# Altium PCB PCB1.PcbDoc
Units mm, origin at the board's own origin, x right, y up, seen from the top; angles counter-clockwise.
Board outline 100 x 100 mm, 2 copper layers (Top Layer, Bottom Layer); 55 components, 40 nets, 167 pads, 48 vias.
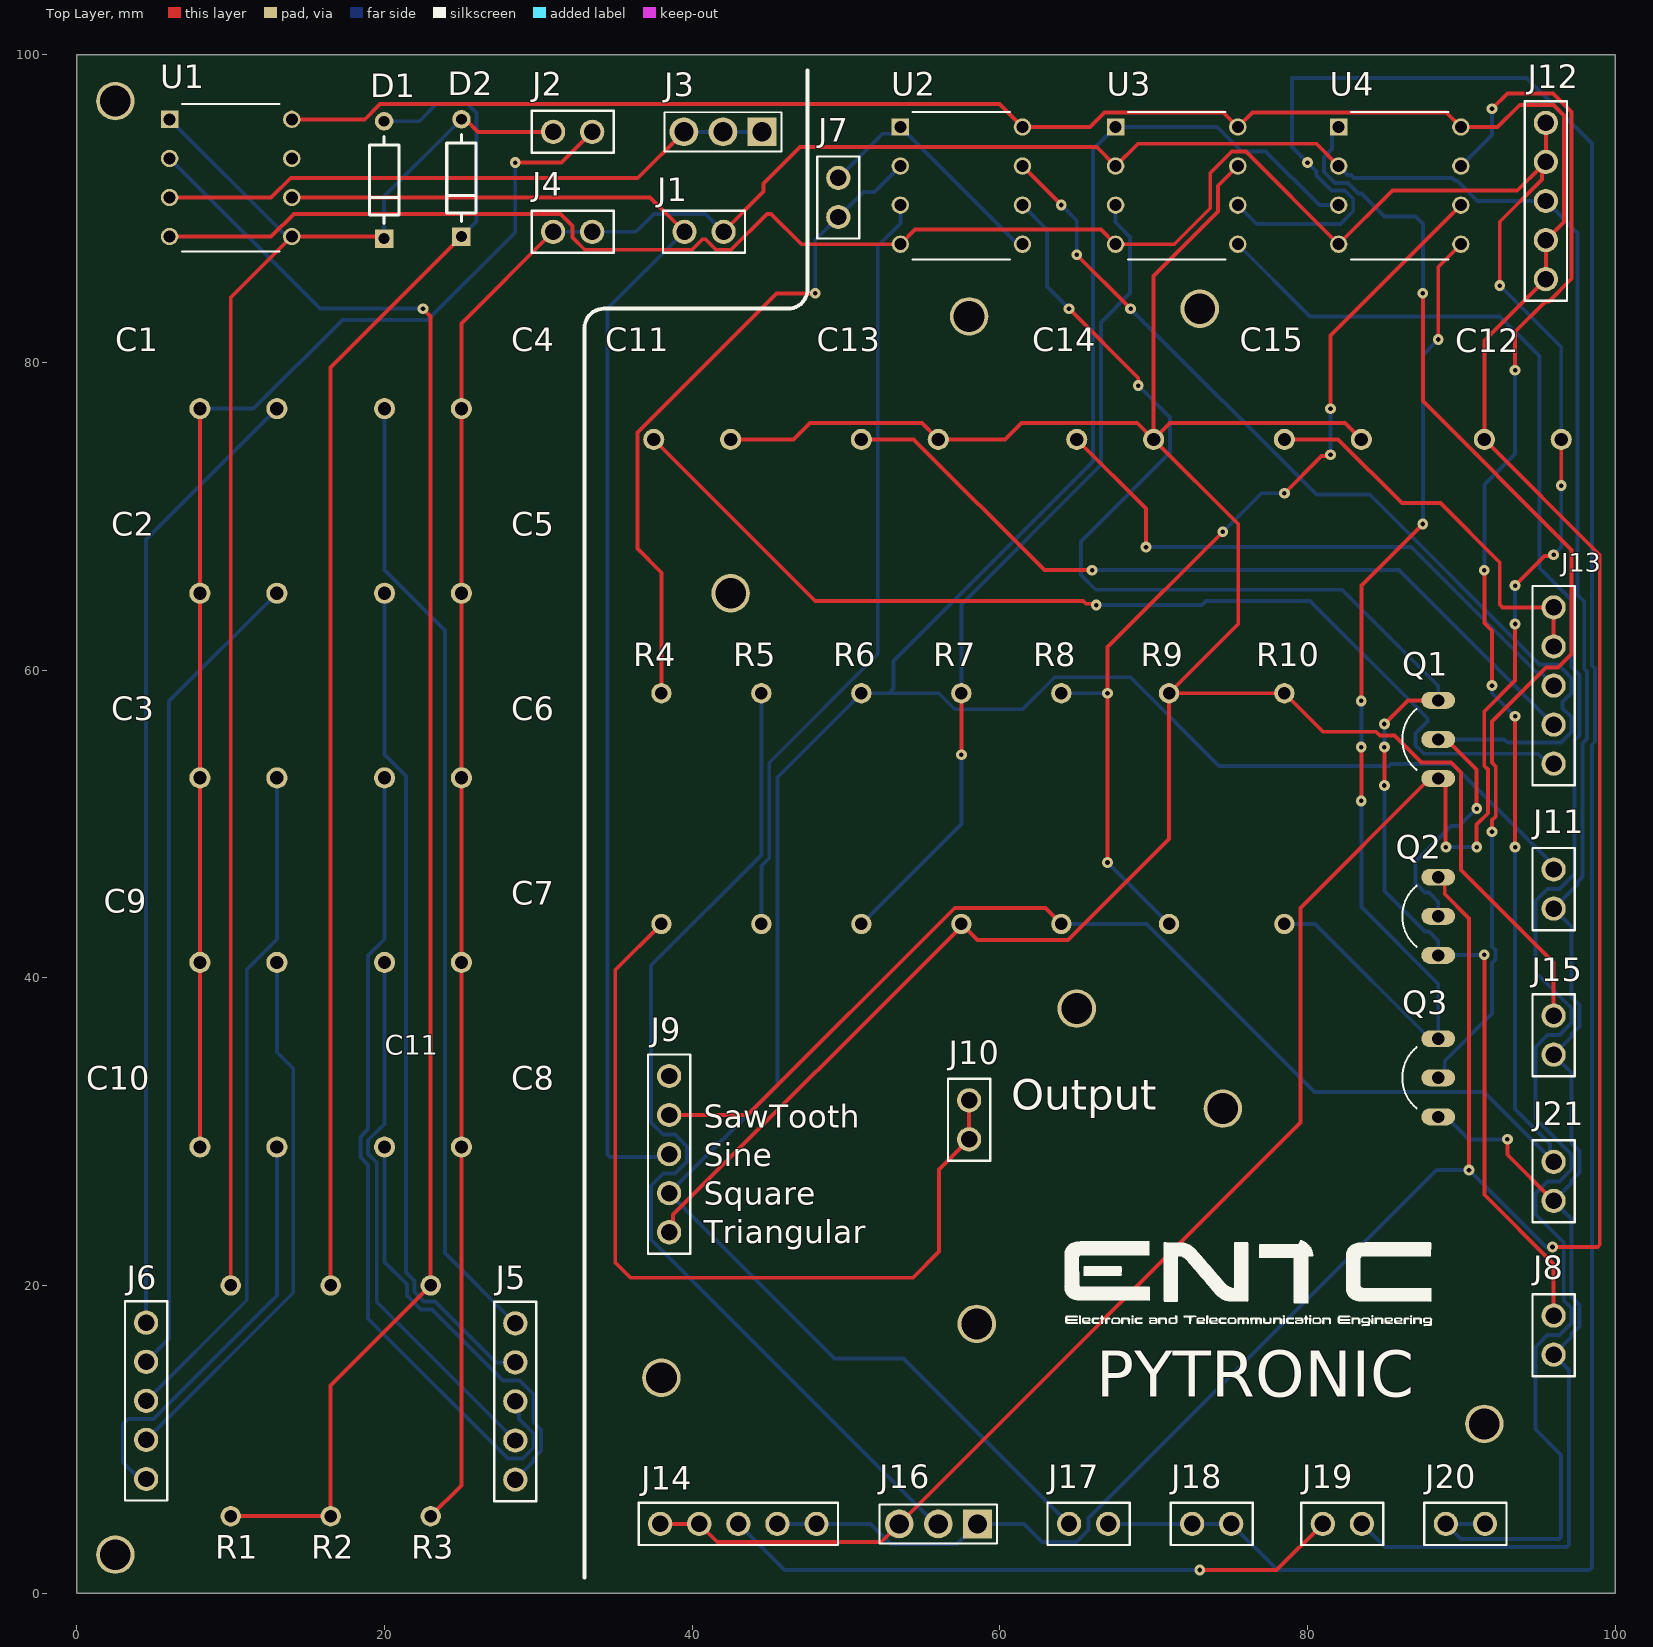
[diagram p0: Top Layer view]
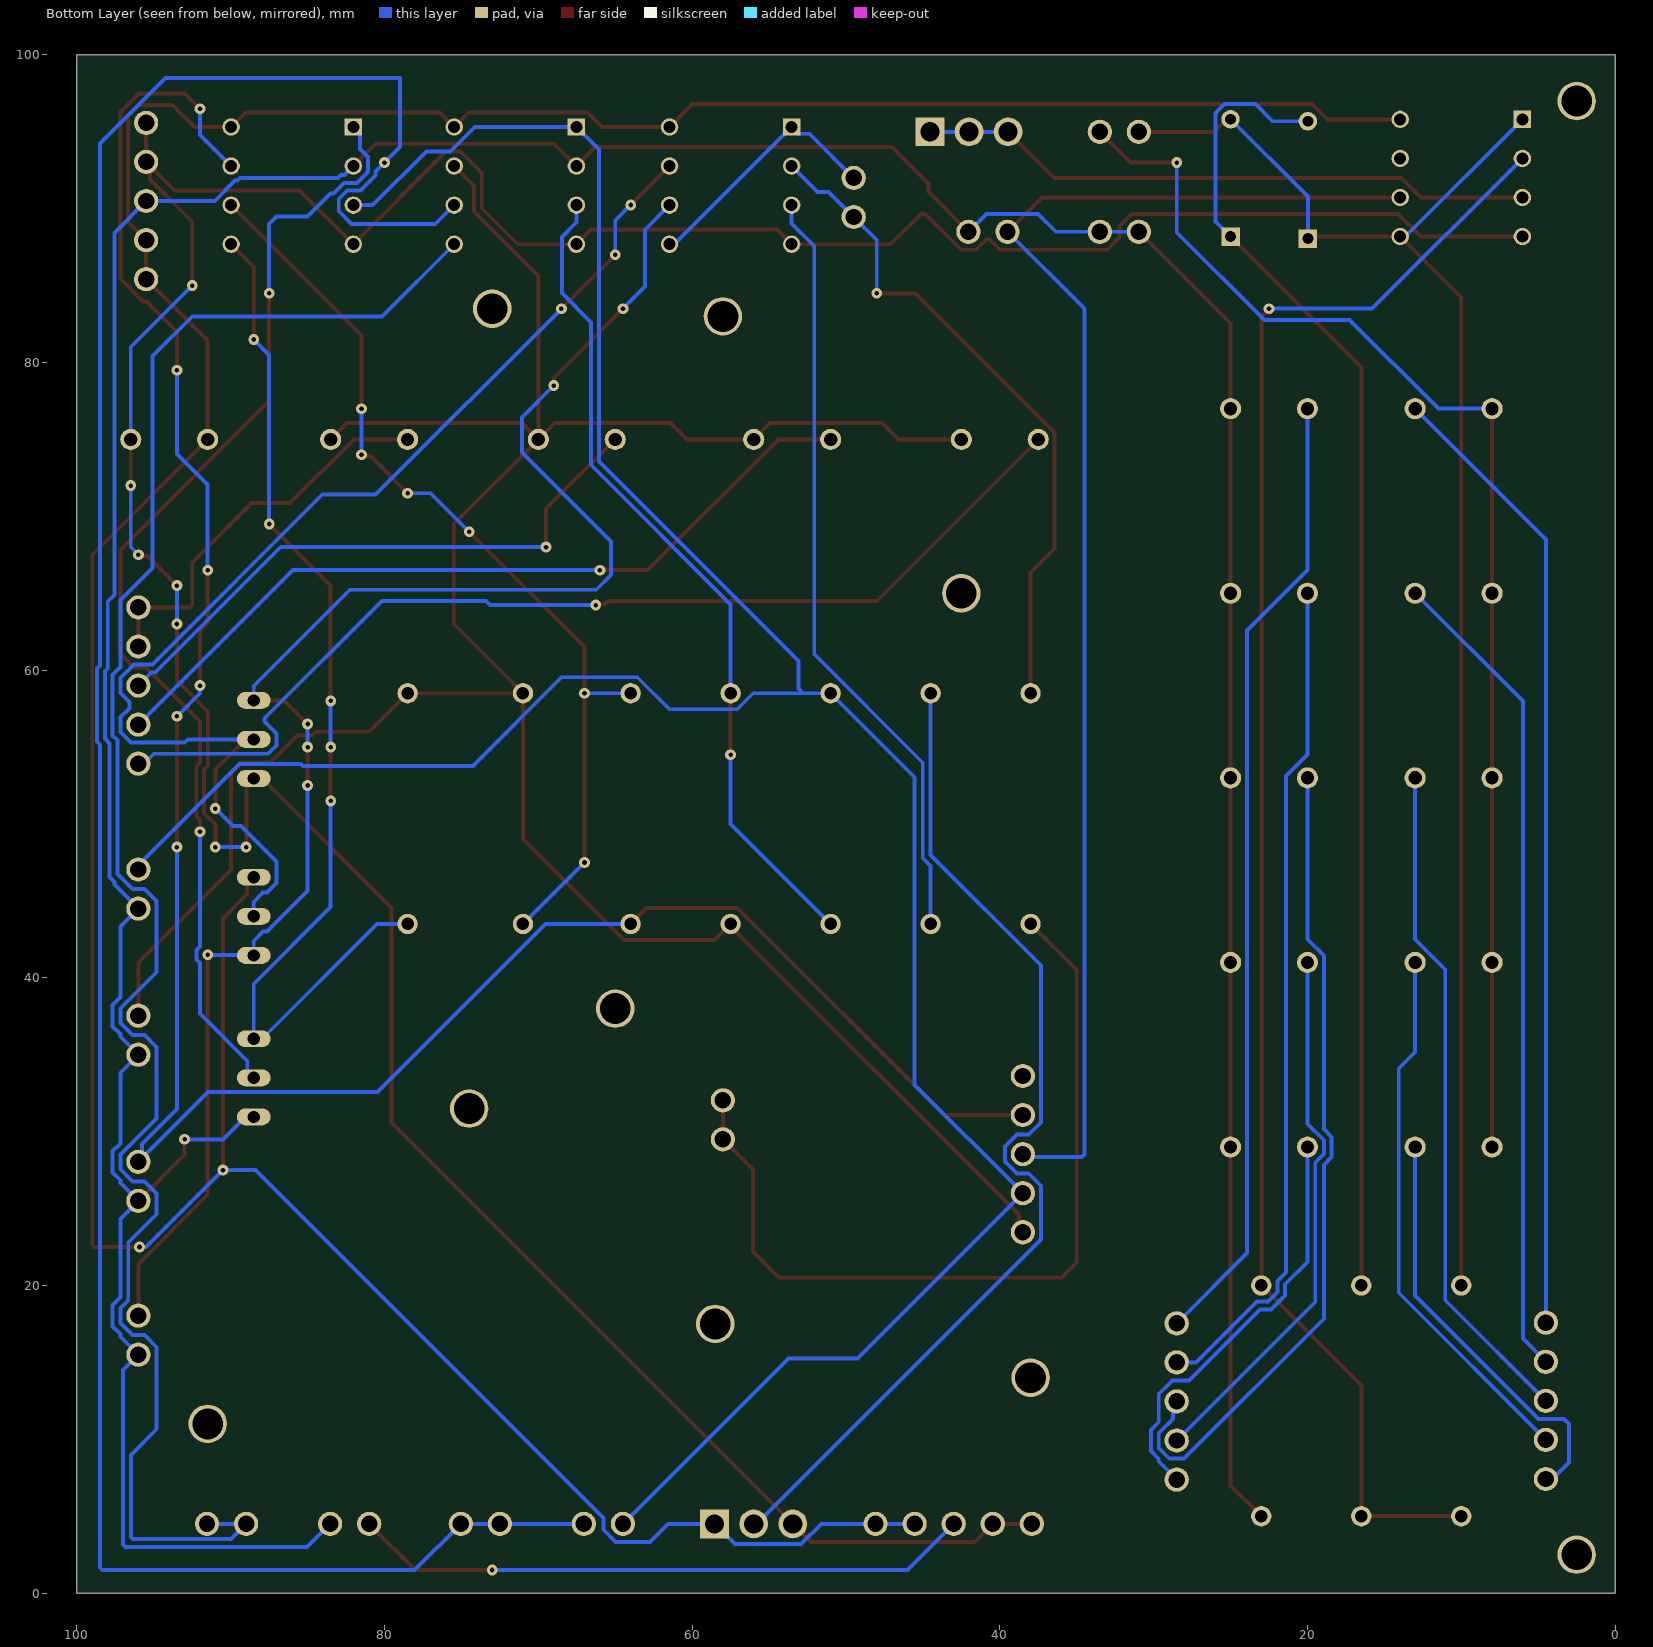
[diagram p1: Bottom Layer view, seen from below]
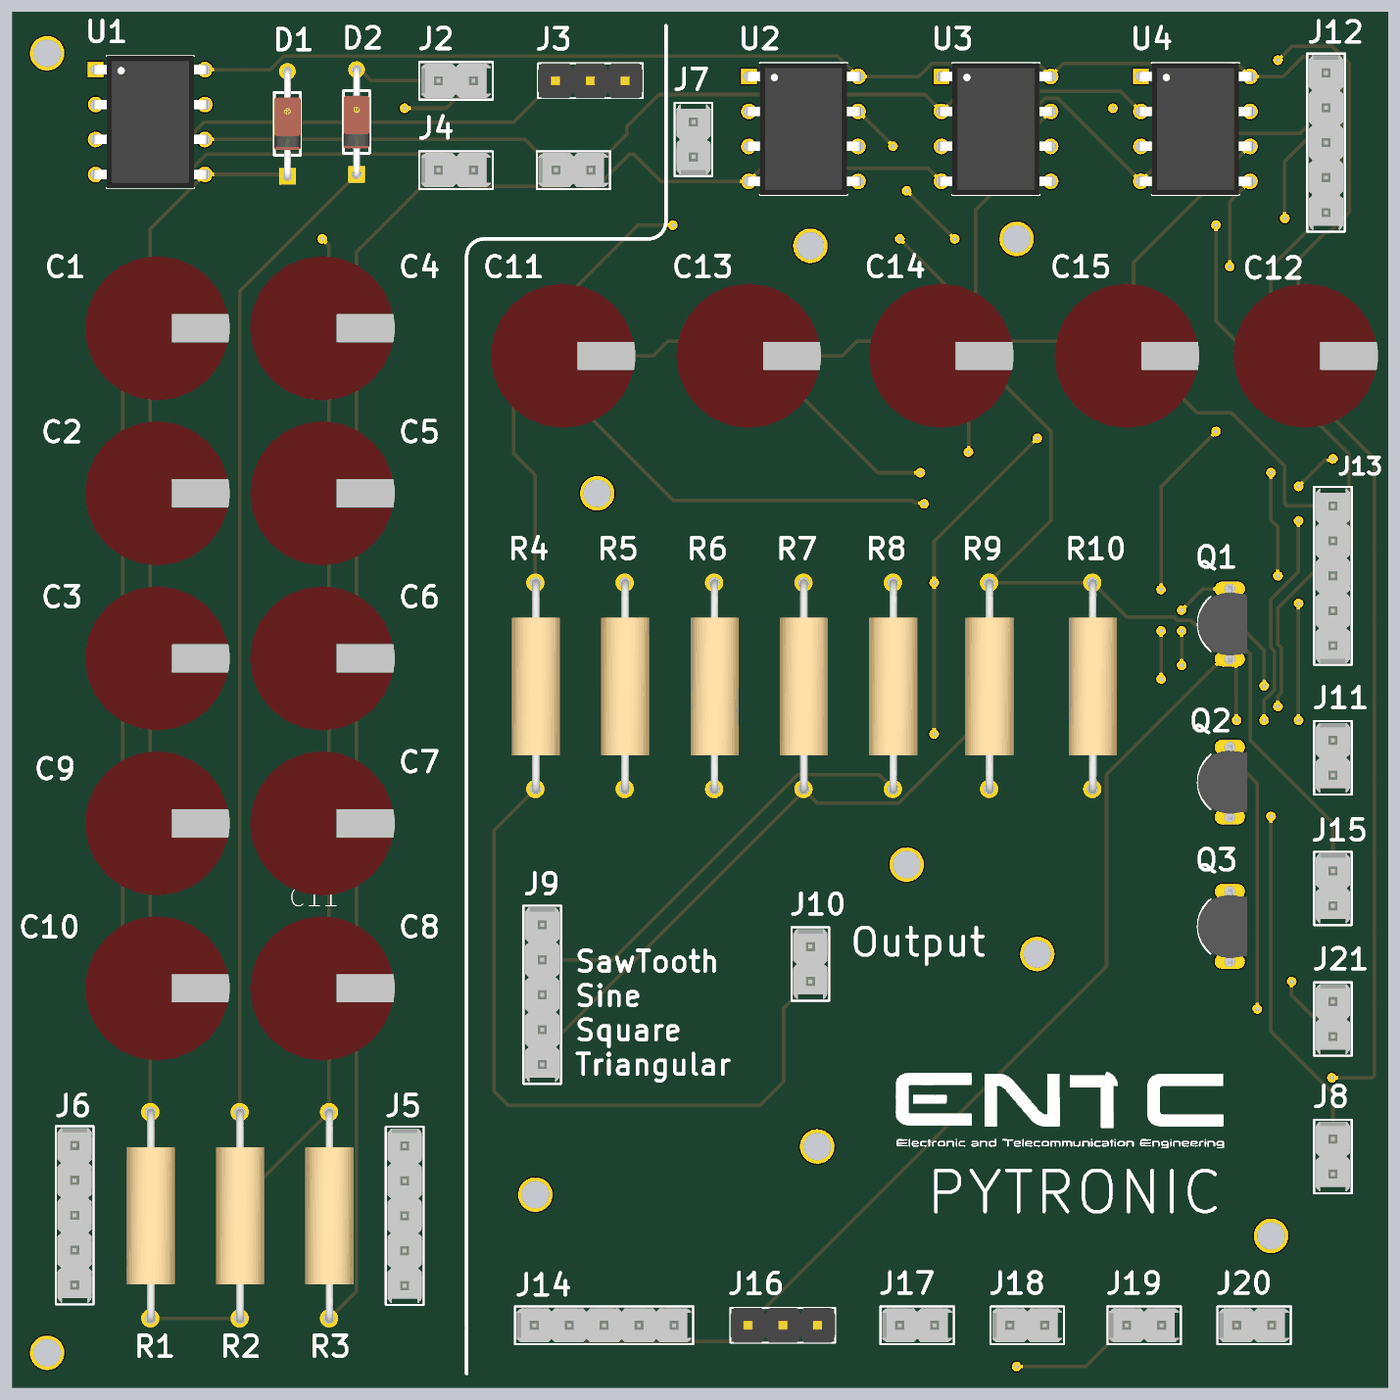
[diagram p2: 3D render of the assembled board from above, using the file's embedded part models]

## Layer stack, top to bottom
Top Solder: solder mask 0.0102, Solder Resist, Dk 3.5
Top Layer: signal copper 0.0356
Dielectric 1: dielectric 0.32, FR-4, Dk 4.8
Bottom Layer: signal copper 0.0356
Bottom Solder: solder mask 0.0102, Solder Resist, Dk 3.5

## Board outline
0,0.046 0.046,0 100,0 100,100 0,100 0,0

## Design rules (kind name [scope] priority, off if disabled: settings)
Clearance [All] p1: gap=0.254 ignorepadtopadclearanceinfootprint=FALSE
PolygonConnect [All] p1: connectstyle=Relief reliefconductorwidth=0.254 reliefentries=4 polygonreliefangle="90 Angle" airgapwidth=0.254
RoutingVias [All] p1: holewidth=0.711 width=1.27 viastyle="Through Hole" minholewidth=0.711 minwidth=1.27 maxholewidth=0.711 maxwidth=1.27
SolderMaskExpansion [All] p1: expansion=0.102 istentingtop=FALSE
SupplyNets "Schematic Supply Nets" [InNet('GND')] p1: voltage=0.000
Width [All] p1: maxlimit=0.254 minlimit=0.254 preferedwidth=0.254
30 further rules are at their usual default settings.

## Components (designator, comment, footprint, x,y, rotation, side; value= is the part's Value field where it differs from the comment)
C1 "10u" CAPACITORS 8,77 r0 top
C2 "0.1n" CAPACITORS 8,65 r0 top
C3 "100n" CAPACITORS 8,53 r0 top
C4 "10u" CAPACITORS 20,77 r0 top
C5 "0.1n" CAPACITORS 20,65 r0 top
C6 "100n" CAPACITORS 20,53 r0 top
C7 "47n" CAPACITORS 20,41 r0 top
C8 "10p" CAPACITORS 20,29 r0 top
C9 "47n" CAPACITORS 8,41 r0 top
C10 "10p" CAPACITORS 8,29 r0 top
C11 "1u" CAPACITORS 37.5,75 r0 top
C12 "1u" CAPACITORS 91.5,75 r0 top
C13 "0.1u" CAPACITORS 51,75 r0 top
C14 "0.01u" CAPACITORS 65,75 r0 top
C15 "1n" CAPACITORS 78.5,75 r0 top
D1 "1N4148TR" FP-017AG-MFG 19.974,91.87 r90 top value=4pF
D2 "1N4148TR" FP-017AG-MFG 25,92 r90 top value=4pF
J1 "Sine Wave" "02PIN HEADERS" 39.5,88.5 r180 top
J2 "Series Res" "02PIN HEADERS" 30.96,95 r180 top
J3 "C2937625" "03PIN HEADERS" 42,95 r180 top
J4 "Shunt Res" "02PIN HEADERS" 30.96,88.5 r180 top
J5 "Shunt Cap" "05pin Headers" 28.5,17.54 r90 top
J6 "Series Cap" "05pin Headers" 4.5,17.58 r90 top
J7 "Offset" "02PIN HEADERS" 49.5,89.46 r270 top
J8 "Final Output" "02PIN HEADERS" 96,18.04 r90 top
J9 "Wave Selecter" "05pin Headers" 38.5,33.62 r90 top
J10 "Wave Connector" "02PIN HEADERS" 58,32.04 r90 top
J11 "Square Wave" "02PIN HEADERS" 96,47.04 r90 top
J12 "Power In" "05pin Headers" 95.5,95.58 r90 top
J13 "5 Headers" "05pin Headers" 96,53.92 r270 top
J14 "5 Headers" "05pin Headers" 37.92,4.5 r180 top
J15 "Triangular Wave" "02PIN HEADERS" 96,37.54 r90 top
J16 "C2937625" "03PIN HEADERS" 56,4.5 r180 top
J17 "2 Headers" "02PIN HEADERS" 64.5,4.5 r180 top
J18 "2 Headers" "02PIN HEADERS" 72.5,4.5 r180 top
J19 "2 Headers" "02PIN HEADERS" 81,4.5 r180 top
J20 "2 Headers" "02PIN HEADERS" 89,4.5 r180 top
J21 "Saw Tooth Wave" "02PIN HEADERS" 96,28.04 r90 top
Q1 "BC557A" TO92254P460H750-3 88.5,55.5 r90 top
Q2 "P2N2222AG" TO92254P460H750-3 88.5,44 r90 top
Q3 "2N3904BU" TO92254P460H750-3 88.5,33.5 r90 top
R1 "100k" Resistor 10,5 r90 top
R2 "47k" Resistor 16.5,5 r90 top
R3 "47k" Resistor 23,5 r90 top
R4 "1k" Resistor 38,43.5 r90 top
R5 "1k" Resistor 44.5,43.5 r90 top
R6 "47k" Resistor 51,43.5 r90 top
R7 "10k" Resistor 57.5,43.5 r90 top
R8 "10k" Resistor 64,43.5 r90 top
R9 "10k" Resistor 71,43.5 r90 top
R10 "10k" Resistor 78.5,43.5 r90 top
U1 "TL072CP" TL072CP 10,92 r0 top
U2 "TL072CP" TL072CP 57.5,91.5 r0 top
U3 "TL072CP" TL072CP 71.5,91.5 r0 top
U4 "TL072CP" TL072CP 86,91.5 r0 top

## Footprints (in the part's own frame and the unit in brackets; to place one, negate y for a bottom-side part, rotate by r counter-clockwise, add the part's x,y. Pads: shape width x height; smd on the part's side, far side on the other; paste and mask are expansions set on the pad)
"02PIN HEADERS" [mil]
  round 62 / inner round 60 / far side round 62 hole 42 paste-99999 mask+0: 1(0,0) 2(-100,0)
  silkscreen extent -155,-54 55,54, body extent -150,-49 50,49, height 384
"03PIN HEADERS" [mm]
  rect 1.875x1.875 / inner round 1.875 / far side rect 1.875x1.875 hole 1.25: 1(-2.54,0)
  round 1.875 hole 1.25: 2(0,0) 3(2.54,0)
  silkscreen extent -3.81,-1.27 3.81,1.27, body extent -3.81,-1.27 3.81,1.27, height 7.27
"05pin Headers" [mil]
  round 62 hole 42: 1(0,0) 2(-100,0) 3(-200,0) 4(-300,0) 5(-400,0)
  silkscreen extent -455,-54 55,54, body extent -450,-49 50,49, height 388
CAPACITORS [mil]
  round 54 / inner round 60 / far side round 54 hole 34 paste-99999 mask+0: 1(0,0) 2(196.85,0)
  body extent -108,-206 306,206, height 867
FP-017AG-MFG [mm]
  rect 1.2x1.2 hole 0.7 paste-2539.97 mask+0: 1(-3.813,0)
  round 1.2 hole 0.7 paste-2539.97 mask+0: 2(3.813,0)
  silkscreen extent -2.81,-0.95 2.81,0.95, body extent -4.51,-1.05 4.51,1.05, height 0.25
Resistor [mil]
  round 52 / inner round 60 / far side round 52 hole 32 paste-99999 mask+0: 1(0,0) 2(590.55,0)
  body extent -13,-70 600,68, height 137
TL072CP [mm]
  rect 1.13x1.13 / inner round 1.13 / far side rect 1.13x1.13 hole 0.78 mask+0.102: 1(-3.97,3.81)
  round 1.13 hole 0.78 mask+0.102: 2(-3.97,1.27) 3(-3.97,-1.27) 4(-3.97,-3.81) 5(3.97,-3.81) 6(3.97,-1.27) 7(3.97,1.27) 8(3.97,3.81)
  silkscreen extent -3.17,-4.79 3.17,4.79, body extent -4.15,-4.79 4.15,4.79, height 5.08
TO92254P460H750-3 [mm]
  oval 1.1x2.2 hole 0.79: 1(-2.54,0) 2(0,0) 3(2.54,0)
  silkscreen extent -1.99,1.4 1.99,2.33, body extent -2.74,-1.27 2.74,2.33, height 8.09

## Part data
C1 C4: library part CC1206JRNPO9BN100, "400V10uF CD110", LCSC=C2960249
C2 C5: library part CC1206JRNPO9BN100, "USR1H0R1MDD", LCSC=C5112145
C3 C6 C15: library part CC1206JRNPO9BN100, "CK45-B3DD102KYNNA", LCSC=C97722
C7 C9: library part CC1206JRNPO9BN100, "KP473J2J0702", LCSC=C390077
C8 C10: library part CC1206JRNPO9BN100, "CC45SL3FD100JYNNA", LCSC=C694205
C11: library part CC1206JRNPO9BN100, "PE105J2A0502", LCSC=C390070
C12: library part CC1206JRNPO9BN100, "CC1206KKX7R7BB105", LCSC=C106236
C13: library part CC1206JRNPO9BN100, "MPP104J2G10NN22640", LCSC=C506840
C14: library part CC1206JRNPO9BN100, "KP103J2G0501", LCSC=C3019055
D1 D2: library part CMP-07163-000030-1, "DIODE GEN PURP 100V 200MA DO35", Capacitance=4pF, Forward Current=200mA, LCSC=C84410, Manufacturer="ON Semiconductor", Max Junction Temp=+175°C, Max Repetitive Reverse Voltage=100V, Max Surge Forward Current=1A, Package=017AG, Peak Reverse Current=5uA, Temperature="-55°C to +175°C", Temperature Range Low=-55°C, Automotive=No, Category=Diode, ComponentLink2Description=Datasheet, ComponentLink2URL=https://www.onsemi.com/pub/Collateral/1N914A-D.pdf, Device Class L1="Discrete Semiconductors", Device Class L2=Diodes, Device Class L3="Rectifier Diodes", Digikey Description="DIODE GEN PURP 100V 200MA DO35", Footprint Url=https://www.onsemi.com/pub/Collateral/017AG.PDF, Height=1.91mm, Lead Free=Yes, Manufacturer Part Number=1N4148TR, Mouser Description="1N4148 Series 100 V 500 mW Small Signal Fast Switching Diode - DO-35", Octopart=https://octopart.com/1n4148tr-on+semiconductor-84323125, Reverse Voltage=100V, RoHS=TRUE, Temperature Range High=+175°C
J1 J2 J4 J7 J8 J10 J11 J15 J17 J18 J19 J20 J21: library part 22284025, "KK 254 Breakaway Header, Vertical, 2 Circuits, 0.38Âµm Gold (Au) Selective Plating, Mating Pin Length 7.49mm", LCSC=C6025575, Manufacturer_Name="Molex Connector Corporation", Copyright="Copyright (C) 2025 Ultra Librarian. All rights reserved.", Manufacturer_Part_Number=22284025, RefDes=RefDes, Type=Type
J3 J16: library part 61300311121, Package=None, Availability=Unavailable, LCSC=C2937625, MP=61300311121, Price=None
J5 J6 J9 J12 J13 J14: library part 22284055, LCSC=C6956150, Package=None, Availability=Unavailable, MP=22284055, Price=None
Q1: "BC557ATA", LCSC=C900807, Package="TO-92 Diotec", Check_prices=https://www.snapeda.com/parts/BC557A/Diotec/view-part/?ref=eda, MF="Diotec Semiconductor", MP=BC557A, SnapEDA_Link=https://www.snapeda.com/parts/BC557A/Diotec/view-part/?ref=snap
R1: library part RT1206WRD07100KL, LCSC=C1365491, Package=None, Availability=Unavailable, MP=RT1206WRD07100KL, Price=None
R2 R3 R6: library part RT1206WRD0747KL, LCSC=C1365518
R4 R5: library part RT1206WRD0710KL, "ROX1SJ1K0", LCSC=C1368147
R7 R8 R9 R10: library part RT1206WRD0710KL, LCSC=C1368139
U1 U2 U3 U4: LCSC=C7236

## Free pads (board coordinates)
  round 2.5 hole 2: 8(2.5,97) 9(2.5,2.5) 10(38,14) 11(58.5,17.5) 12(74.5,31.5) 13(65,38) 14(91.5,11) 15(58,83) 16(73,83.5) 17(42.5,65)

## Via types
v1: diameter 0.7, hole 0.3, Top Layer to Bottom Layer, 48 vias

## Nets (pads, with @x,y where several pads share a name; then routed paths per layer and width w, separated by ;. In a path a pad name is that pad's centre, name@x,y a point inside that pad or via, vN(x,y) a via of type N, cw(c..) or ccw(c..) an arc to the next point about the centre after c; other vN are vias at no path point)
+VCC: C12.1 J12.4 J12.5 J14.4 J14.5 J16.1 Q2.3 U1.8 U2.8 U3.8 U4.8 | length 252.3
  Top Layer w0.254: U1.8 18.713,95.81 19.697,96.794 59.986,96.794 U2.8 65.861,95.31 66.807,96.256 74.524,96.256 U3.8 76.416,96.256 89.024,96.256 U4.8 92.364,95.31 93.802,96.748 95.984,96.748 96.668,96.064 96.668,89.128 J12.4 J12.5 91.5,81.42 C12.1 99,67.5 99,22.649 98.851,22.5 v1(95.929,22.5) ; Q2.3 88.532,46.54 88.923,46.149 88.923,45.444 90.5,43.867 v1(90.5,27.5)
  Bottom Layer w0.254: J14.4 J14.5 51.595,4.5 52.914,3.181 57.221,3.181 J16.1 61.583,4.5 62.751,3.332 64.984,3.332 65.77,4.118 65.77,4.882 88.388,27.5 v1(90.5,27.5) 95.5,22.5 v1(95.929,22.5)
-VCC: C12.2 J12.1 J12.2 J14.1 J14.2 J16.3 Q1.1 U1.4 U2.4 U3.4 U4.4 | length 242.1
  Top Layer w0.254: U1.4 12.632,88.19 14.111,89.668 31.444,89.668 32.23,88.882 32.23,88.118 33.016,87.332 39.984,87.332 40.665,88.012 40.875,88.012 41.556,87.332 42.524,87.332 44.861,89.668 45.126,89.668 47.105,87.69 U2.4 54.476,88.636 66.584,88.636 U3.4 71.341,87.69 73.683,90.031 73.683,92.321 75.078,93.716 76.004,93.716 U4.4 85.516,91.176 93.636,91.176 J12.2@95.247,92.787 ; J14.1 J14.2 41.628,3.332 52.292,3.332 J16.3 79.541,30.581 79.541,44.551 87.95,52.96 Q1.1 88.571,52.96 88.961,52.569 88.961,48.539 v1(89,48.5) ; v1(91,48.5) 91,49.966 91.731,50.697 91.731,53.537 91.492,53.776 91.492,57.324 93.5,59.332 v1(93.5,63) ; v1(92.5,85) 92.5,89.152 95.247,91.9 J12.2@95.247,92.787 ; v1(93.5,65.5) 95.415,67.415 95.915,67.415 v1(96,67.5) ; J12.1 J12.2 J12.2@95.247,92.787 ; v1(96.5,72) C12.2
  Bottom Layer w0.254: v1(89,48.5) v1(91,48.5) ; v1(92.5,85) 96.5,81 C12.2 ; v1(93.5,63) v1(93.5,65.5) ; v1(96,67.5) 96.5,68 v1(96.5,72)
GND: C4.2 C5.2 C6.2 C7.2 C8.2 J1.2 J4.1 J4.2 J8.2 J11.2 J12.3 J15.2 J19.2 J21.2 Q3.1 R3.1 U3.2 U4.2 | length 276
  Top Layer w0.254: R3.1 25,7 C8.2 C7.2 C6.2 C5.2 C4.2 25,82.54 J4.1 ; J1.2 44.646,91.106 44.646,91.646 47,94 66.3,94 U3.2 68.984,94.224 80.576,94.224 U4.2 ; v1(93,29.5) 93,28.5 J21.2
  Bottom Layer w0.254: J4.1 J4.2 36.336,88.5 37.505,89.668 40.872,89.668 J1.2 ; U4.2 82.608,92.192 82.843,92.192 83.035,92 89.402,92 89.578,91.824 89.714,91.824 91.038,90.5 J12.3 97.567,88.433 97.567,64.884 97.992,64.459 97.992,60.097 98.184,59.905 98.184,55.555 97.876,55.246 97.876,46.545 97.567,46.236 97.567,46.067 J11.2 97.168,43.332 97.168,38.742 97.676,38.234 97.676,36.846 97.168,36.338 97.168,36.168 J15.2 97.168,33.832 97.168,29.242 97.676,28.734 97.676,27.346 97.168,26.838 97.168,26.668 J21.2 97.168,24.332 97.168,19.242 97.676,18.734 97.676,17.346 97.168,16.838 97.168,16.668 J8.2 97,14.5 97,3.149 96.851,3 93.898,3 85.04,3 J19.2 ; Q3.1 89.05,30.96 90.51,29.5 v1(93,29.5)
NetC1_1: C1.1 C2.1 C3.1 C9.1 C10.1 J2.2 | length 83.6
  Top Layer w0.254: C10.1 C9.1 C3.1 C2.1 C1.1 ; v1(28.5,93) 31.5,93 J2.2
  Bottom Layer w0.254: C1.1 11.491,77 17.26,82.769 22.803,82.769 28.5,88.466 v1(28.5,93)
NetC1_2: C1.2 J6.1 | length 62.9
  Bottom Layer w0.254: J6.1 4.5,68.5 C1.2
NetC2_2: C2.2 J6.2 | length 53.5
  Bottom Layer w0.254: J6.2 6,16.54 6,58 C2.2
NetC3_2: C3.2 J6.3 | length 44
  Bottom Layer w0.254: J6.3 11.041,19.041 11.041,40.55 13,42.509 C3.2
NetC4_1: C4.1 J5.1 | length 63
  Bottom Layer w0.254: C4.1 20,66.509 23.933,62.575 23.933,22.107 J5.1
NetC5_1: C5.1 J5.2 | length 54.7
  Bottom Layer w0.254: C5.1 20,54.509 21.391,53.117 21.391,20.854 21.959,20.287 21.959,19.569 22.569,18.959 23.287,18.959 27.246,15 J5.2
NetC6_1: C6.1 J5.3 | length 54.3
  Bottom Layer w0.254: C6.1 20,42.509 18.933,41.442 18.933,30.16 18.425,29.652 18.425,28.348 18.933,27.84 18.933,17.834 28.016,8.752 28.984,8.752 29.668,9.436 29.668,10.404 28.753,11.32 28.753,12.207 J5.3
NetC7_1: C7.1 J5.4 | length 35.5
  Bottom Layer w0.254: C7.1 20,30.509 18.933,29.442 18.933,28.558 19.492,27.999 19.492,18.928 J5.4
NetC8_1: C8.1 J5.5 | length 27.6
  Bottom Layer w0.254: C8.1 20,21.527 21.451,20.077 21.451,19.358 22.358,18.451 23.077,18.451 27.696,13.832 28.781,13.832 29.668,12.944 29.668,11.122 30.176,10.614 30.176,9.226 29.668,8.718 29.668,8.548 J5.5
NetC9_2: C9.2 J6.4 | length 35.4
  Bottom Layer w0.254: J6.4 14.067,19.527 14.067,34.094 13,35.161 C9.2
NetC10_2: C10.2 J6.5 | length 27.6
  Bottom Layer w0.254: J6.5 4.143,7.42 3.78,7.782 3.718,7.782 3,8.5 3,11 3.332,11.332 4.984,11.332 13,19.348 C10.2
NetC11_1: C11.1 J13.1 | length 69.6
  Top Layer w0.254: C11.1 48,64.5 65.409,64.5 65.59,64.318 66.182,64.318 v1(66.267,64.233)
  Bottom Layer w0.254: v1(66.267,64.233) 73.147,64.233 73.414,64.5 80.173,64.5 87.798,56.875 87.798,56.665 87.019,55.886 87.019,55.114 87.564,54.569 94.997,54.569 95.646,53.92 J13.1
NetC11_2: C11.2 C13.2 C14.2 C15.2 J9.5 J15.1 R7.1 R9.2 R10.2 U3.7 | length 177.8
  Top Layer w0.254: J9.5 38.753,23.713 38.753,24.6 57.5,43.348 R7.1 58.541,42.459 64.431,42.459 71,49.027 R9.2 ; C11.2 46.589,75 47.656,76.067 54.933,76.067 C13.2 60.339,75 61.406,76.067 68.933,76.067 C14.2 ; U3.7 74.191,91.491 74.191,89.821 70,85.63 C14.2 ; C15.2 82.433,76.067 71.067,76.067 C14.2 ; J15.1 96,41 89.981,47.019 89.981,53.346 89.327,54 87.42,54 85.67,55.75 84.716,55.75 84.466,56 81,56 R10.2 R9.2 ; C14.2 75.5,69.5 75.5,63 R9.2
NetC13_1: C13.1 J13.2 | length 52.7
  Top Layer w0.254: C13.1 54.401,75 62.901,66.5 v1(66,66.5)
  Bottom Layer w0.254: v1(66,66.5) 85.96,66.5 J13.2
NetC14_1: C14.1 J13.3 | length 39.1
  Top Layer w0.254: C14.1 69.5,70.5 v1(69.5,68)
  Bottom Layer w0.254: v1(69.5,68) 86.748,68 94.884,59.864 95.136,59.864 J13.3
NetC15_1: C15.1 J13.4 J13.5 | length 26.2
  Top Layer w0.254: C15.1 81.991,75 86.136,70.855 88.645,70.855 92.5,67 92.5,64.263 92.683,64.08 J13.5 J13.4
NetD1_1: D1.1 D2.2 J2.1 R1.2 U1.1 U1.5 | length 103.1
  Top Layer w0.254: R1.2 10,84.22 U1.5 19.841,88.19 D1.1 ; D2.2 25.256,95.813 26.069,95 J2.1
  Bottom Layer w0.254: U1.1 13.482,88.358 13.802,88.358 U1.5 ; D1.1 19.974,90.787 D2.2
NetD1_2: D1.2 D2.1 R2.2 | length 86.9
  Top Layer w0.254: R2.2 16.5,79.687 D2.1
  Bottom Layer w0.254: D1.2 22.263,95.683 23.374,96.794 25.406,96.794 25.981,96.219 25.981,89.168 D2.1
NetJ1_1: J1.1 J9.3 U1.6 | length 92.7
  Top Layer w0.254: U1.6 37.27,90.73 J1.1
  Bottom Layer w0.254: J9.3 38.319,28.359 34.649,28.359 34.5,28.508 34.5,83.5 J1.1
NetJ3_1: J3.1 J3.2 J3.3 U1.3 | length 40.3
  Top Layer w0.254: U1.3 12.632,90.73 13.902,92 36.46,92 J3.3
  Bottom Layer w0.254: J3.3 J3.2 J3.1
NetJ7_1: J7.1 R4.2 U2.2 | length 43.9
  Top Layer w0.254: R4.2 38,66.332 36.433,67.899 36.433,75.442 45.491,84.5 v1(48,84.5)
  Bottom Layer w0.254: v1(48,84.5) 48,87.96 J7.1 51.138,91.098 51.858,91.098 U2.2
NetJ7_2: J7.2 U2.1 U2.5 | length 16.5
  Bottom Layer w0.254: J7.2 52.372,94.872 53.092,94.872 U2.1 60.982,87.858 61.302,87.858 U2.5
NetJ8_1: J8.1 Q1.3 Q2.1 U2.6 | length 106.7
  Top Layer w0.254: v1(64.5,83.5) 69,79 v1(69,78.5) ; v1(85,52.5) v1(85,55) ; v1(85,56.5) 86.54,58.04 Q1.3 ; v1(91.5,41.5) 91.5,25.896 96,21.396 J8.1
  Bottom Layer w0.254: U2.6 63.069,88.631 63.069,84.931 v1(64.5,83.5) ; v1(69,78.5) 71.067,76.433 71.067,74.154 65.269,68.356 65.269,66.197 66.235,65.231 82.24,65.231 88.5,58.971 Q1.3 ; v1(85,52.5) 85,45.633 87.631,43.003 87.888,43.003 88.5,42.391 Q2.1 88.52,41.48 91.48,41.48 v1(91.5,41.5) ; v1(85,55) v1(85,56.5)
NetJ9_2: J9.2 J21.1 R8.1 U4.7 | length 152.8
  Top Layer w0.254: J9.2 43.607,31.08 57.069,44.541 62.959,44.541 R8.1 ; v1(91.5,66.5) 91.5,63.06 92,62.56 v1(92,59) ; v1(92,96.5) 93,97.5 95.951,97.5 97.176,96.274 97.176,85.444 95.7,83.968 95.468,83.968 93.5,82 v1(93.5,79.5) ; v1(93.5,48.5) v1(93.5,57)
  Bottom Layer w0.254: R8.1 69.527,43.5 80.458,32.569 91.471,32.569 J21.1@95.766,28.274 ; U4.7 92,94.8 v1(92,96.5) ; v1(91.5,66.5) 91.5,72.06 93.5,74.06 v1(93.5,79.5) ; v1(92,59) 92,58.5 v1(93.5,57) ; v1(93.5,48.5) 93.5,31.474 95.766,29.208 J21.1@95.766,28.274 ; J21.1 J21.1@95.766,28.274
NetJ9_4: J9.4 J11.1 J17.1 R6.2 U3.1 U4.3 | length 183.8
  Bottom Layer w0.254: J17.1 53.75,15.25 49.25,15.25 J9.4 45.541,33.041 45.541,53.041 R6.2 52.794,58.5 ; U4.3 80.77,90.23 77.284,93.716 75.726,93.716 74.132,95.31 U3.1 66.067,93.847 66.067,73.567 53.092,60.592 53.092,58.798 52.794,58.5 ; J11.1 96,47.327 89.436,53.891 85.425,53.891 85.303,53.769 74.258,53.769 68.486,59.541 63.569,59.541 61.486,57.459 57.069,57.459 56.027,58.5 52.794,58.5
NetJ10_1: J10.1 J10.2 R4.1 | length 56.1
  Top Layer w0.254: R4.1 35,40.5 35,21.5 36,20.5 54.351,20.5 56.049,22.198 56.049,27.549 J10.2 J10.1
NetJ14_3: J14.3 J19.1 | length 40.5
  Top Layer w0.254: v1(73,1.5) 78,1.5 J19.1
  Bottom Layer w0.254: J14.3 46,1.5 v1(73,1.5)
NetJ16_2: J16.2 R5.2 | length 67.6
  Bottom Layer w0.254: R5.2 44.5,47.988 37.332,40.819 37.332,30.596 38.118,29.81 38.882,29.81 39.668,29.024 39.668,28.056 38.882,27.27 38.118,27.27 37.332,26.484 37.332,22.976 55.808,4.5 J16.2
NetJ17_2: J17.2 J18.1 J18.2 U3.6 | length 165.9
  Bottom Layer w0.254: J17.2 J18.1 J18.2 78.04,1.5 98.351,1.5 98.5,1.649 98.5,55.152 98.692,55.345 98.692,60.115 98.5,60.308 98.5,94.232 94.232,98.5 79,98.5 79,94 v1(80,93) 80.576,92.424 80.576,92.168 81.568,91.176 82.422,91.176 82.976,90.622 82.976,89.838 82.138,89 76.7,89 U3.6
NetJ20_1: J20.1 J20.2 U3.5 | length 120.4
  Bottom Layer w0.254: U3.5 80.16,83 92.5,83 95.088,80.412 95.088,66.644 97.168,64.564 97.168,60.202 97.676,59.694 97.676,55.766 97.368,55.457 97.368,46.755 96.382,45.77 95.618,45.77 94.832,44.984 94.832,40.361 97.168,38.024 97.168,37.056 96.382,36.27 95.618,36.27 94.832,35.484 94.832,30.861 97.168,28.524 97.168,27.556 96.382,26.77 95.618,26.77 94.832,25.984 94.832,24.632 96.66,22.803 96.66,19.032 97.168,18.524 97.168,17.556 96.382,16.77 95.618,16.77 94.832,15.984 94.832,10.651 96.492,8.99 96.492,3.657 96.343,3.508 89.992,3.508 J20.1 J20.2
NetQ1_2: Q1.2 Q2.2 U2.7 | length 79.4
  Top Layer w0.254: U2.7 v1(64,90.24) ; v1(65,87) v1(68.5,83.5) ; Q1.2 89.05,55.5 91,53.55 v1(91,51)
  Bottom Layer w0.254: v1(64,90.24) 65,89.24 v1(65,87) ; v1(68.5,83.5) 68.5,83.491 80.574,71.417 84.049,71.417 95.095,60.372 96.281,60.372 97.168,59.484 97.168,58.516 96.593,57.94 96.593,57.52 97.168,56.944 97.168,55.976 96.484,55.292 92.986,55.292 92.777,55.5 Q1.2 ; Q2.2 88.5,44.931 87.888,45.543 87.631,45.543 87.019,46.154 87.019,47.553 89.325,49.859 89.859,49.859 v1(91,51)
NetQ3_2: Q3.2 U4.1 | length 75.1
  Top Layer w0.254: v1(87.5,84.5) 87.5,77.491 97.168,67.823 97.168,61.056 96.281,60.168 95.516,60.168 92,56.652 92,53.987 92.239,53.748 92.239,50.487 92,50.248 v1(92,49.5)
  Bottom Layer w0.254: U4.1 81.592,94.872 81.592,93.879 81.084,93.371 81.084,92.378 81.778,91.684 82.632,91.684 83.316,91 83.5,91 85.017,89.483 87.017,89.483 87.5,89 v1(87.5,84.5) ; Q3.2 88.532,33.5 88.923,33.891 88.923,34.596 92,37.673 92,40.966 92.231,41.197 92.231,41.803 92,42.034 v1(92,49.5)
NetQ3_3: Q3.3 R10.1 U4.5 | length 69.5
  Top Layer w0.254: v1(83.5,51.5) v1(83.5,55) ; v1(83.5,58) 83.5,65.5 v1(87.5,69.5) ; v1(88.5,81.5) 88.5,86.22 U4.5
  Bottom Layer w0.254: R10.1 80.49,43.5 87.95,36.04 Q3.3 88.5,39.593 83.5,44.593 v1(83.5,51.5) ; v1(83.5,55) v1(83.5,58) ; v1(87.5,69.5) 87.5,80.5 v1(88.5,81.5)
NetR1_1: R1.1 R2.1 R3.2 U1.2 | length 108.4
  Top Layer w0.254: R1.1 R2.1 16.5,13.5 R3.2 23,83 v1(22.5,83.5)
  Bottom Layer w0.254: U1.2 15.8,83.5 v1(22.5,83.5)
NetR5_1: R5.1 U2.3 | length 50.5
  Bottom Layer w0.254: R5.1 44.5,47.269 45.008,47.777 45.008,53.981 52.067,61.04 52.067,87.565 53.53,89.028 U2.3
NetR6_1: R6.1 R7.2 U3.3 | length 54.4
  Top Layer w0.254: v1(57.5,54.5) R7.2
  Bottom Layer w0.254: R6.1 57.5,50 v1(57.5,54.5) ; R7.2 57.5,64.282 66.575,73.356 66.575,82.609 68.476,84.51 68.476,88.173 67.53,89.119 U3.3
NetR8_2: R8.2 R9.1 U4.6 | length 62.1
  Top Layer w0.254: v1(67,47.5) v1(67,58.5) 67,61.5 v1(74.5,69) ; v1(78.5,71.5) 80.915,73.915 81.415,73.915 v1(81.5,74) ; v1(81.5,77) 81.5,81.76 U4.6
  Bottom Layer w0.254: R8.2 v1(67,58.5) ; v1(67,47.5) R9.1 ; v1(74.5,69) 77,71.5 v1(78.5,71.5) ; v1(81.5,74) v1(81.5,77)
pads on no net: J9.1 U1.7

## Silkscreen, mask and mechanical layers (free items; w line width, h text height)
Top Overlay:
  drawing of 58 lines, arcs and shapes, not listed
  text "Output" at 60.754,31.42 h2
  text "SawTooth" at 40.754,30.254 h1.5
  text "Sine" at 40.754,27.754 h1.5
  text "Square" at 40.754,25.254 h1.5
  text "Triangular" at 40.754,22.754 h1.5
  text "PYTRONIC" at 66.254,12.754 h3